# Altium PCB DB10012_IMU.PcbDoc
Units mm, origin at the board's own origin, x right, y up, seen from the top; angles counter-clockwise.
Board outline 65 x 44 mm, 2 copper layers (Top Layer, Bottom Layer), stack 1.57 mm thick; 14 components, 16 nets, 90 pads, 74 vias.
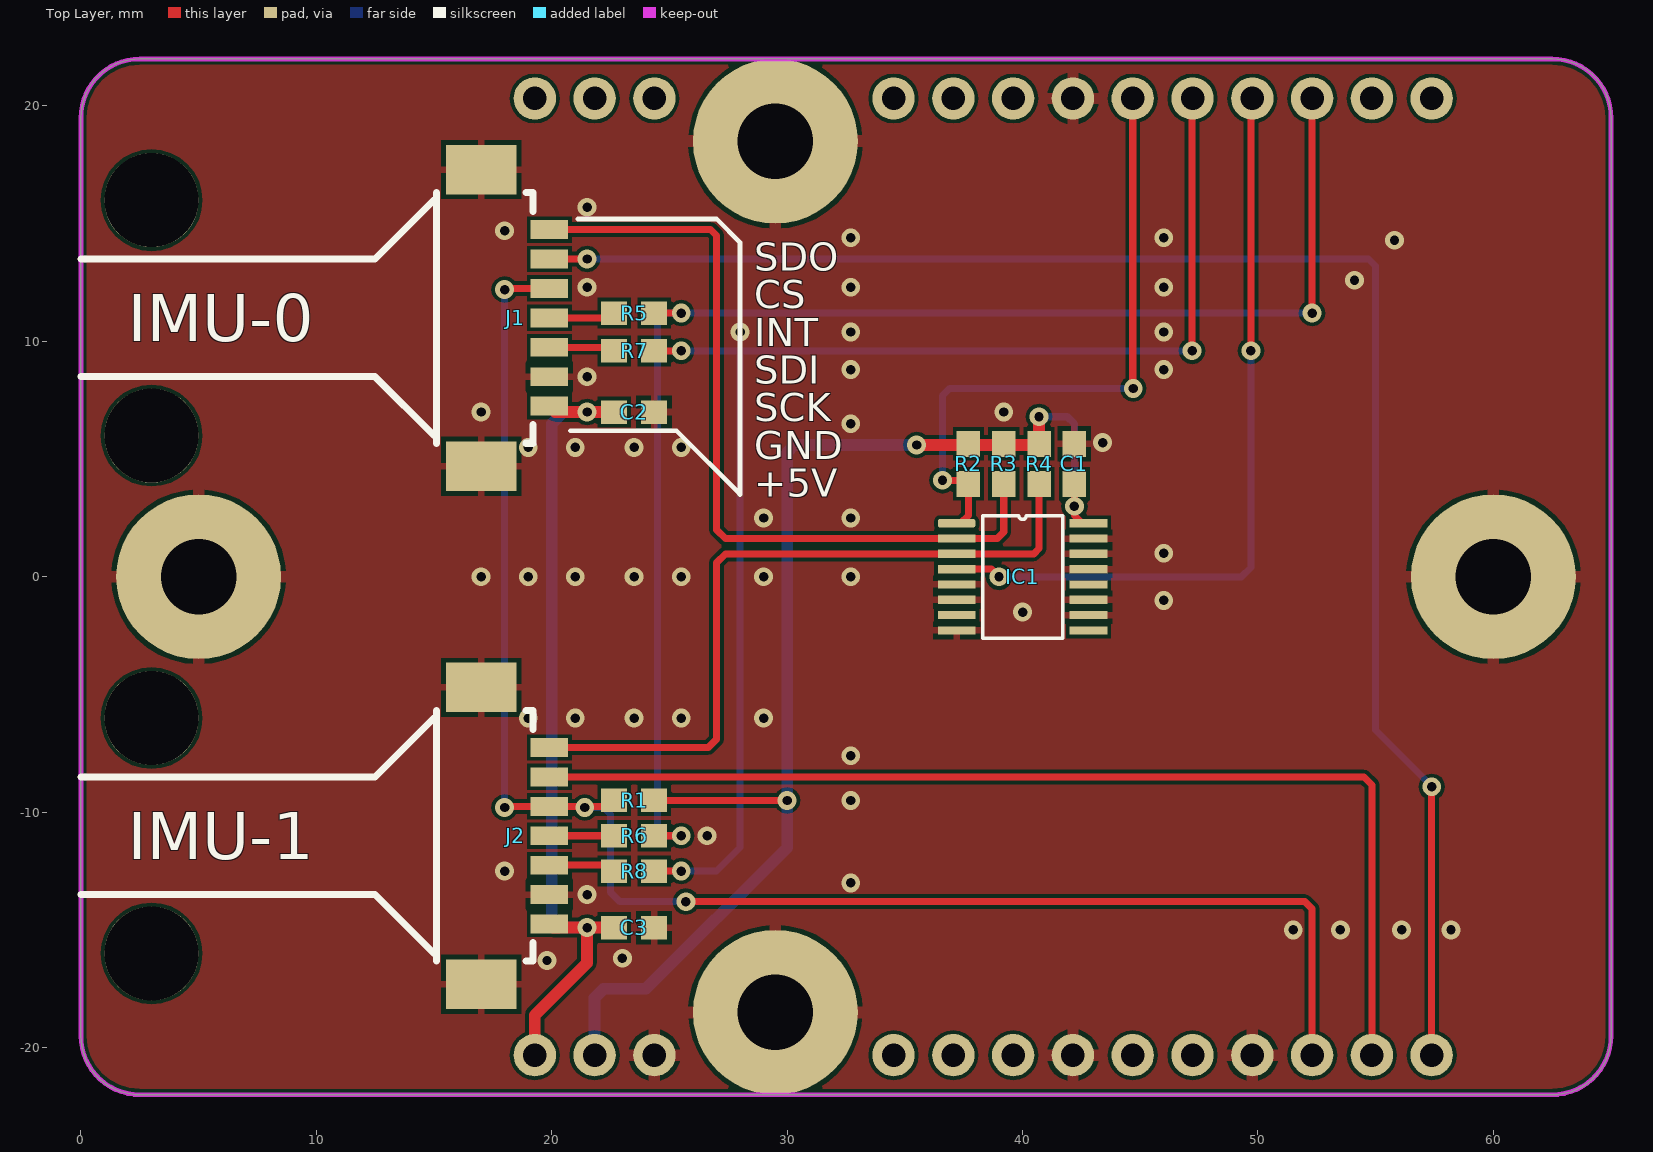
[diagram p0: Top Layer view]
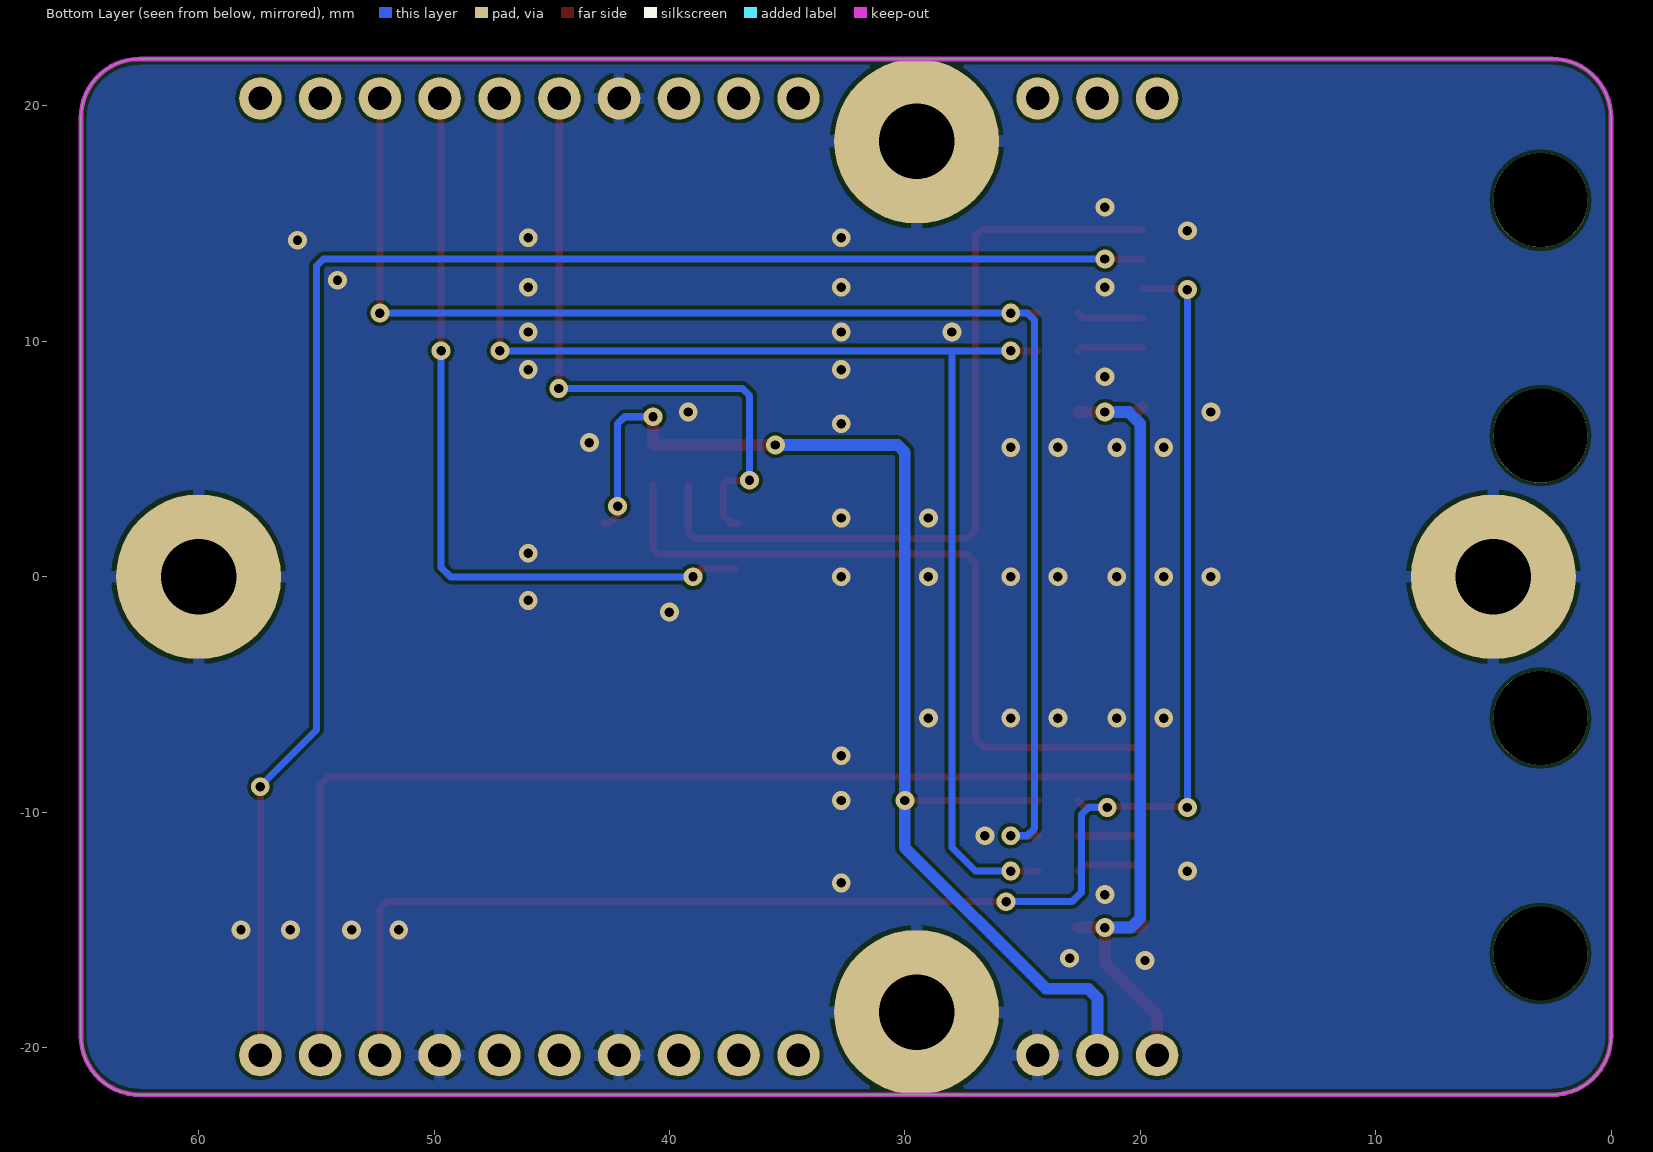
[diagram p1: Bottom Layer view, seen from below]

## Layer stack, top to bottom
Top Solder: solder mask 0.01, Solder Resist, Dk 3.5
Top Layer: signal copper 0.035
Dielectric 1: dielectric 1.5, FR-4, Dk 4.8
Bottom Layer: signal copper 0.035
Bottom Solder: solder mask 0.01, Solder Resist, Dk 3.5

## Board outline
0,-19.5 0,19.5 cw(c2.5,19.5) 2.5,22 62.5,22 cw(c62.5,19.5) 65,19.5 65,-19.5 cw(c62.5,-19.5) 62.5,-22 2.5,-22 cw(c2.5,-19.5)

## Design rules (kind name [scope] priority, off if disabled: settings)
Clearance [All] p1: gap=0.15 ignorepadtopadclearanceinfootprint=FALSE
HoleSize [All] p1: absolutevalues=TRUE maxlimit=10 minlimit=0.25 maxpercent=80.000 minpercent=20.000
MinimumSolderMaskSliver [All] p1 off: minsoldermaskwidth=0.254
PlaneClearance [All] p1: clearance=0.25
PlaneConnect [All] p1: planeconnectstyle=Relief reliefexpansion=0.3 reliefentries=4 reliefconductorwidth=0.2 reliefairgap=0.2
PolygonConnect [All] p1: thpad.connectstyle=Relief thpad.reliefconductorwidth=0.5 thpad.reliefentries=4 thpad.polygonreliefangle="90 Angle" thpad.airgapwidth=0.2 smdpad.connectstyle=Relief smdpad.reliefconductorwidth=0.3 smdpad.reliefentries=4 smdpad.polygonreliefangle="90 Angle" smdpad.airgapwidth=0.2 via.connectstyle=Direct via.reliefconductorwidth=0.3 via.reliefentries=4 via.polygonreliefangle="90 Angle" via.airgapwidth=0.2
RoutingVias [All] p1: holewidth=0.711 width=1.27 viastyle="Through Hole" minholewidth=0.711 minwidth=1.27 maxholewidth=0.711 maxwidth=1.27
SilkToSilkClearance [All] p1 off: silktosilkclearance=0.254
SilkToSolderMaskClearance [IsPad] p1 off: minsilkscreentomaskgap=0.254 clearancetoexposedcopper=TRUE
SolderMaskExpansion [All] p1: expansion=0.102
Width [All] p1: maxlimit=10 minlimit=0.15 preferedwidth=0.2
24 further rules are at their usual default settings.

## Components (designator, comment, footprint, x,y, rotation, side; value= is the part's Value field where it differs from the comment)
C1 "2.2uF" C0603 42.2,4.8 r270 top
C2 "2.2uF" C0603 23.5,7 r180 top
C3 "2.2uF" C0603 23.5,-14.9 r180 top
IC1 "SN74LVC157A" TSSOP16 40,0 r0 top
J1 "53261-0771" 53261-0771 17,11 r270 top
J2 "53261-0771" 53261-0771 17,-11 r270 top
R1 "10K" 0603 23.5,-9.5 r0 top
R2 "10K" 0603 37.7,4.8 r90 top
R3 "10K" 0603 39.2,4.8 r90 top
R4 "10K" 0603 40.7,4.8 r90 top
R5 "100R" 0603 23.5,11.2 r180 top
R6 "100R" 0603 23.5,-11 r180 top
R7 "100R" 0603 23.5,9.6 r180 top
R8 "100R" 0603 23.5,-12.5 r180 top

## Footprints (in the part's own frame and the unit in brackets; to place one, negate y for a bottom-side part, rotate by r counter-clockwise, add the part's x,y. Pads: shape width x height; smd on the part's side, far side on the other; paste and mask are expansions set on the pad)
0603 [mm]
  rect 1.1x1 smd: 1(-0.85,0) 2(0.85,0)
  body extent -0.95,-0.45 0.95,0.45, height 0.45
53261-0771 [mm]
  rect 2.1x3 smd: 0(-6.3,0) 0(6.3,0)
  rect 0.8x1.6 smd: 1(-3.75,2.9) 2(-2.5,2.9) 3(-1.25,2.9) 4(0,2.9) 5(1.25,2.9) 6(2.5,2.9) 7(3.75,2.9)
  silkscreen extent -5.33,-1.9 5.33,2.2, body extent -6.95,-1.9 6.95,3.3, height 3.41
C0603 [mm]
  rect 1.1x1 smd: 1(-0.85,0) 2(0.85,0)
  body extent -0.95,-0.45 0.95,0.45, height 0.45
TSSOP16 [mm]
  rrect50% 1.6x0.35 smd: 1(-2.8,2.275)
  rect 1.6x0.35 smd: 2(-2.8,1.625) 3(-2.8,0.975) 4(-2.8,0.325) 5(-2.8,-0.325) 6(-2.8,-0.975) 7(-2.8,-1.625) 8(-2.8,-2.275) 9(2.8,-2.275) 10(2.8,-1.625) 11(2.8,-0.975) 12(2.8,-0.325) 13(2.8,0.325) 14(2.8,0.975) 15(2.8,1.625) 16(2.8,2.275)
  silkscreen extent -1.7,-2.6 1.7,2.6, body extent -3.14,-2.5 3.14,2.5, height 1.09

## Part data
C1 C2 C3: library part 2.2uF/0603/CER/10V/X5R, "Capacitor, 2.2uF, 10V, X5R", Capacitance Tolerance="± 10%", Capacitor Case Style=C0603, Dielectric Characteristic=X5R, Temperature Range="-55°C to +85°C", Voltage Rating=10V, Brand=MURATA, Brand Number=GRM188R61A225ME34D, Capacitance=2.2uF, Order Code Supplier=2426956, Price=0,008, Supplier=Farnell
IC1: "8:4 DATA SELECTOR/MUX", Case Style=TSSOP, Temperature Range="-55°C to +155°C", Brand="Texas Instruments", Brand Number=SN74LVC157APWRE4, Order Code Supplier=1236315, Price=0,21, Supplier=Farnell
J1 J2: "PicoBlade 53261 Series, 7Pin, Right Angle", Brand=Molex, Brand Number=53261-0771, Case Style=53261-0771, Order Code Supplier=1125361, Pitch=1,25mm, Price=1,80, Supplier=Farnell
R1 R2 R3 R4: library part 10K/0603/0063W/50V, "Resistor, 10K, 1%, 0.063W, 50V, 100PPM, 0603", Case Style=0603, Power Rating=0.063W, Temperature Coefficient="± 100PPM", Temperature Range="-55°C to +125°C", Voltage Rating=50V, Brand="VISHAY DRALORIC", Brand Number=CRCW060310K0FKEA, Order Code Supplier=2122493, Price=0,038, Resistance=10K, Supplier=Farnell
R5 R6 R7 R8: library part 100/0603/0063W/50V, "Resistor, 100R, 1%, 0.063W, 50V, 200PPM, 0603", Case Style=0603, Power Rating=0.063W, Temperature Coefficient="± 200PPM", Temperature Range="-55°C to +125°C", Voltage Rating=50V, Brand="VISHAY DRALORIC", Brand Number=CRCW0603100RFKEA, Order Code Supplier=2122239, Price=0,007, Resistance=100R, Supplier=Farnell

## Free pads (board coordinates)
  round 4 hole 4 unplated: 0(3,-16) 0(3,-6) 0(3,6) 0(3,16)
  round 7 / inner round 4.2 / far side round 7 hole 3.2: 0(5,0) 0(29.5,-18.5) 0(29.5,18.5) 0(60,0)
  round 1.8 hole 1: 1(19.28,20.32) 2(21.82,20.32) 3(24.36,20.32) 4(34.52,20.32) 5(37.06,20.32) 6(39.6,20.32) 7(42.14,20.32) 8(44.68,20.32) 9(47.22,20.32) 10(49.76,20.32) 11(52.3,20.32) 12(54.84,20.32) 13(57.38,20.32) 14(57.38,-20.32) 15(54.84,-20.32) 16(52.3,-20.32) 17(49.76,-20.32) 18(47.22,-20.32) 19(44.68,-20.32) 20(42.14,-20.32) 21(39.6,-20.32) 22(37.06,-20.32) 23(34.52,-20.32) 24(24.36,-20.32) 25(21.82,-20.32) 26(19.28,-20.32)

## Via types
v1: diameter 0.8, hole 0.4, Top Layer to Bottom Layer, tented both sides, 74 vias

## Nets (pads, with @x,y where several pads share a name; then routed paths per layer and width w, separated by ;. In a path a pad name is that pad's centre, name@x,y a point inside that pad or via, vN(x,y) a via of type N, cw(c..) or ccw(c..) an arc to the next point about the centre after c; other vN are vias at no path point)
+3V3: C1.2 IC1.16 pad.25 R1.2 R2.2 R3.2 R4.2 | length 54.8
  Top Layer w0.3: R1.2 v1(30,-9.5) ; C1.2 v1(42.2,3) 42.2,2.6 42.525,2.275 IC1.16
  Top Layer w0.5: v1(35.5,5.6) R4.2@40.65,5.6 ; R4.2 v1(40.7,6.8)
  Bottom Layer w0.3: v1(40.7,6.8) 41.9,6.8 42.2,6.5 v1(42.2,3)
  Bottom Layer w0.5: pad.25 21.82,-17.88 22.2,-17.5 24,-17.5 30,-11.5 v1(30,-9.5) 30,5.3 30.3,5.6 v1(35.5,5.6)
+5V: C2.2 C3.2 J1.7 J2.7 pad.26 | length 36.4
  Top Layer w0.5: pad.26 19.28,-18.62 21.5,-16.4 v1(21.5,-14.9) ; J2.7 20.05,-14.9 v1(21.5,-14.9) ; J1.7 20.15,7 v1(21.5,7) C2.2 ; C3.2 v1(21.5,-14.9)
  Bottom Layer w0.5: v1(21.5,-14.9) 20.4,-14.9 20,-14.5 20,6.5 20.5,7 v1(21.5,7)
CS0: J1.2 pad.14 | length 69.7
  Top Layer w0.3: J1.2 v1(21.5,13.5) ; pad.14 v1(57.38,-8.92)
  Bottom Layer w0.3: v1(21.5,13.5) 54.7,13.5 55,13.2 55,-6.5 v1@57.4,-8.9
CS1: J2.2 pad.15 | length 46.6
  Top Layer w0.3: J2.2 54.5,-8.5 54.84,-8.84 pad.15
GND: C1.1 C2.1 C3.1 IC1.5 IC1.6 IC1.8 IC1.10 IC1.11 IC1.13 IC1.14 IC1.15 J1.0 J1.6 J2.0 J2.6 pad.0@5,0 pad.0@29.5,18.5 pad.0@29.5,-18.5 pad.0@60,0 pad.7 pad.17 pad.20 pad.24
  other v1: 19.8,-16.3 23,-16.2 51.5,-15 53.5,-15 56.1,-15 58.2,-15 21.5,-13.5 32.7,-13 18,-12.5 26.6,-11 32.7,-9.5 32.7,-7.6 19,-6 21,-6 23.5,-6 25.5,-6 29,-6 40,-1.5 46,-1 17,0 19,0 21,0 23.5,0 25.5,0 29,0 32.7,0 46,1 29,2.5 32.7,2.5 19,5.5 21,5.5 23.5,5.5 25.5,5.5 43.4,5.7 32.7,6.5 17,7 39.2,7 21.5,8.5 32.7,8.8 46,8.8 28,10.4 32.7,10.4 46,10.4 21.5,12.3 32.7,12.3 46,12.3 54.1,12.6 55.8,14.3 32.7,14.4 46,14.4 18,14.7 21.5,15.7
IMU_SELECT: IC1.1 pad.8 R2.1 | length 27.2
  Top Layer w0.3: v1(36.6,4.1) R2.1@37.55,4.1 ; IC1.1@37.1,2.275 37.375,2.275 37.7,2.6 R2.1 ; pad.8 44.68,8.02 v1(44.7,8)
  Bottom Layer w0.3: v1(36.6,4.1) 36.6,7.7 36.9,8 v1(44.7,8)
INT: J1.3 J2.3 pad.16 R1.1 | length 69.5
  Top Layer w0.3: v1(18,-9.8) 18.05,-9.75 J2.3 22.4,-9.75 R1.1 ; v1(18,12.2) 18.05,12.25 J1.3 ; v1(25.7,-13.8) 52,-13.8 52.3,-14.1 pad.16
  Bottom Layer w0.3: v1(18,-9.8) v1(18,12.2) ; v1(21.4,-9.8) 22.2,-9.8 22.5,-10.1 22.5,-13.4 22.9,-13.8 v1(25.7,-13.8)
MISO: IC1.4 pad.10 | length 32.7
  Top Layer w0.3: IC1.4 38.675,0.325 v1(39,0) ; v1(49.7,9.6) 49.7,20.26 pad.10
  Bottom Layer w0.3: v1(39,0) 49.3,0 49.7,0.4 v1(49.7,9.6)
MISO_0: IC1.2 J1.1 R3.1 | length 34.2
  Top Layer w0.3: J1.1 26.75,14.75 27,14.5 27,2 27.375,1.625 IC1.2 38.925,1.625 39.2,1.9 R3.1@39.2,3.9
MISO_1: IC1.3 J2.1 R4.1 | length 31.4
  Top Layer w0.3: J2.1 26.65,-7.25 27,-6.9 27,0.6 27.375,0.975 IC1.3 40.475,0.975 40.7,1.2 R4.1
MOSI: pad.11 R5.1 R6.1 | length 62.1
  Top Layer w0.3: R6.1 v1(25.5,-11) ; R5.1 v1(25.5,11.2) ; v1(52.3,11.2) pad.11
  Bottom Layer w0.3: v1(25.5,-11) 24.8,-11 24.5,-10.7 24.5,10.9 24.8,11.2 v1(25.5,11.2) v1(52.3,11.2)
NetJ1_4: J1.4 R5.2 | length 2.8
  Top Layer w0.3: J1.4 22.45,11 R5.2
NetJ1_5: J1.5 R7.2 | length 2.8
  Top Layer w0.3: J1.5 22.5,9.75 R7.2
NetJ2_4: J2.4 R6.2 | length 2.8
  Top Layer w0.3: J2.4 R6.2
NetJ2_5: J2.5 R8.2 | length 2.9
  Top Layer w0.3: J2.5 22.4,-12.25 R8.2
SCK: pad.9 R7.1 R8.1 | length 58.7
  Top Layer w0.3: R8.1 v1(25.5,-12.5) ; R7.1 v1(25.5,9.6) ; v1(47.2,9.6) 47.2,20.3 pad.9
  Bottom Layer w0.3: v1(25.5,-12.5) 27,-12.5 28,-11.5 28,9.6 ; v1(25.5,9.6) v1(47.2,9.6)
pads on no net: IC1.7 IC1.9 IC1.12

## Polygon pours and split planes (outlines as drawn)
GND on Top Layer "GND" (solid, pour order 0): 0,-22 0,22 65,22 65,-22
GND on Bottom Layer "GND" (solid, pour order 2): 0,-22 0,22 65,22 65,-22

## Keep-outs
Keep-Out Layer:
  the board outline again, w0.2

## Silkscreen, mask and mechanical layers (free items; w line width, h text height)
Top Overlay:
  lines w0.2: 20.8,6.2 25.3,6.2 28,3.5 28,14.2 27,15.2 21.1,15.2
  lines w0.3: 0,-13.5 12.5,-13.5 15,-16 ; 0,-8.5 12.5,-8.5 15,-6 ; 0,8.5 12.5,8.5 15,6 ; 0,13.5 12.5,13.5 15,16
  text "SDO" at 28.6,13 h1.2
  text "CS" at 28.6,11.4 h1.2
  text "IMU-0" at 2,10 h2
  text "INT" at 28.6,9.8 h1.2
  text "SDI" at 28.6,8.2 h1.2
  text "SCK" at 28.6,6.6 h1.2
  text "GND" at 28.6,5 h1.2
  text "+5V" at 28.6,3.4 h1.2
  text "IMU-1" at 2,-12 h2
Top Solder:
  text "IMU-Shield" at 11.6,6.9 h1.5 r270
  text "V0.1" at 9.3,2.3 h1.5 r270